# Altium PCB isokey_right.PcbDoc (part 1 of 2)
Units mm, origin at the board's own origin, x right, y up, seen from the top; angles counter-clockwise.
Board outline 380.25 x 127.5 mm, 2 copper layers (Top Layer, Bottom Layer), stack 1.569 mm thick; 152 components, 91 nets, 418 pads, 0 vias.
Unrouted connection lines stored in the file: 221.
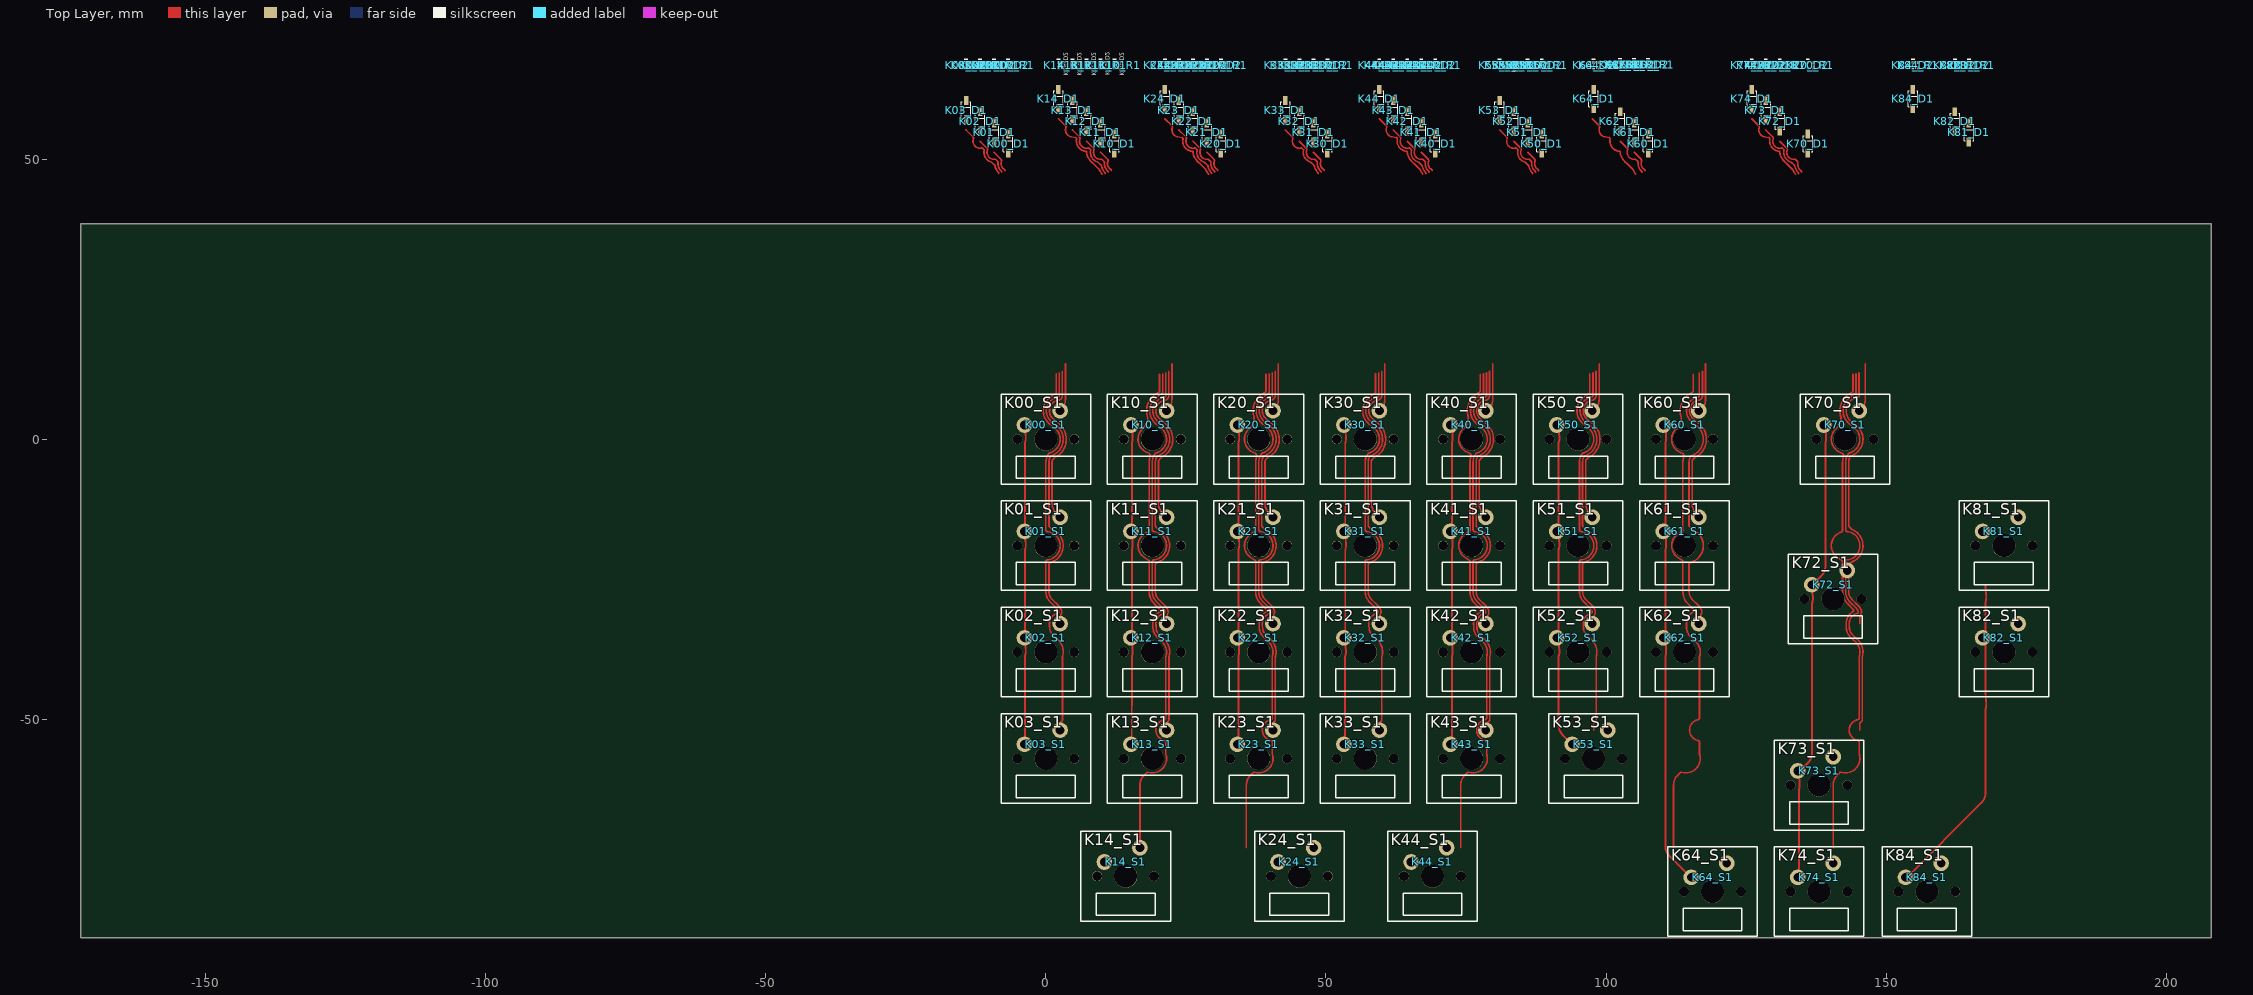
[diagram p0: Top Layer view]
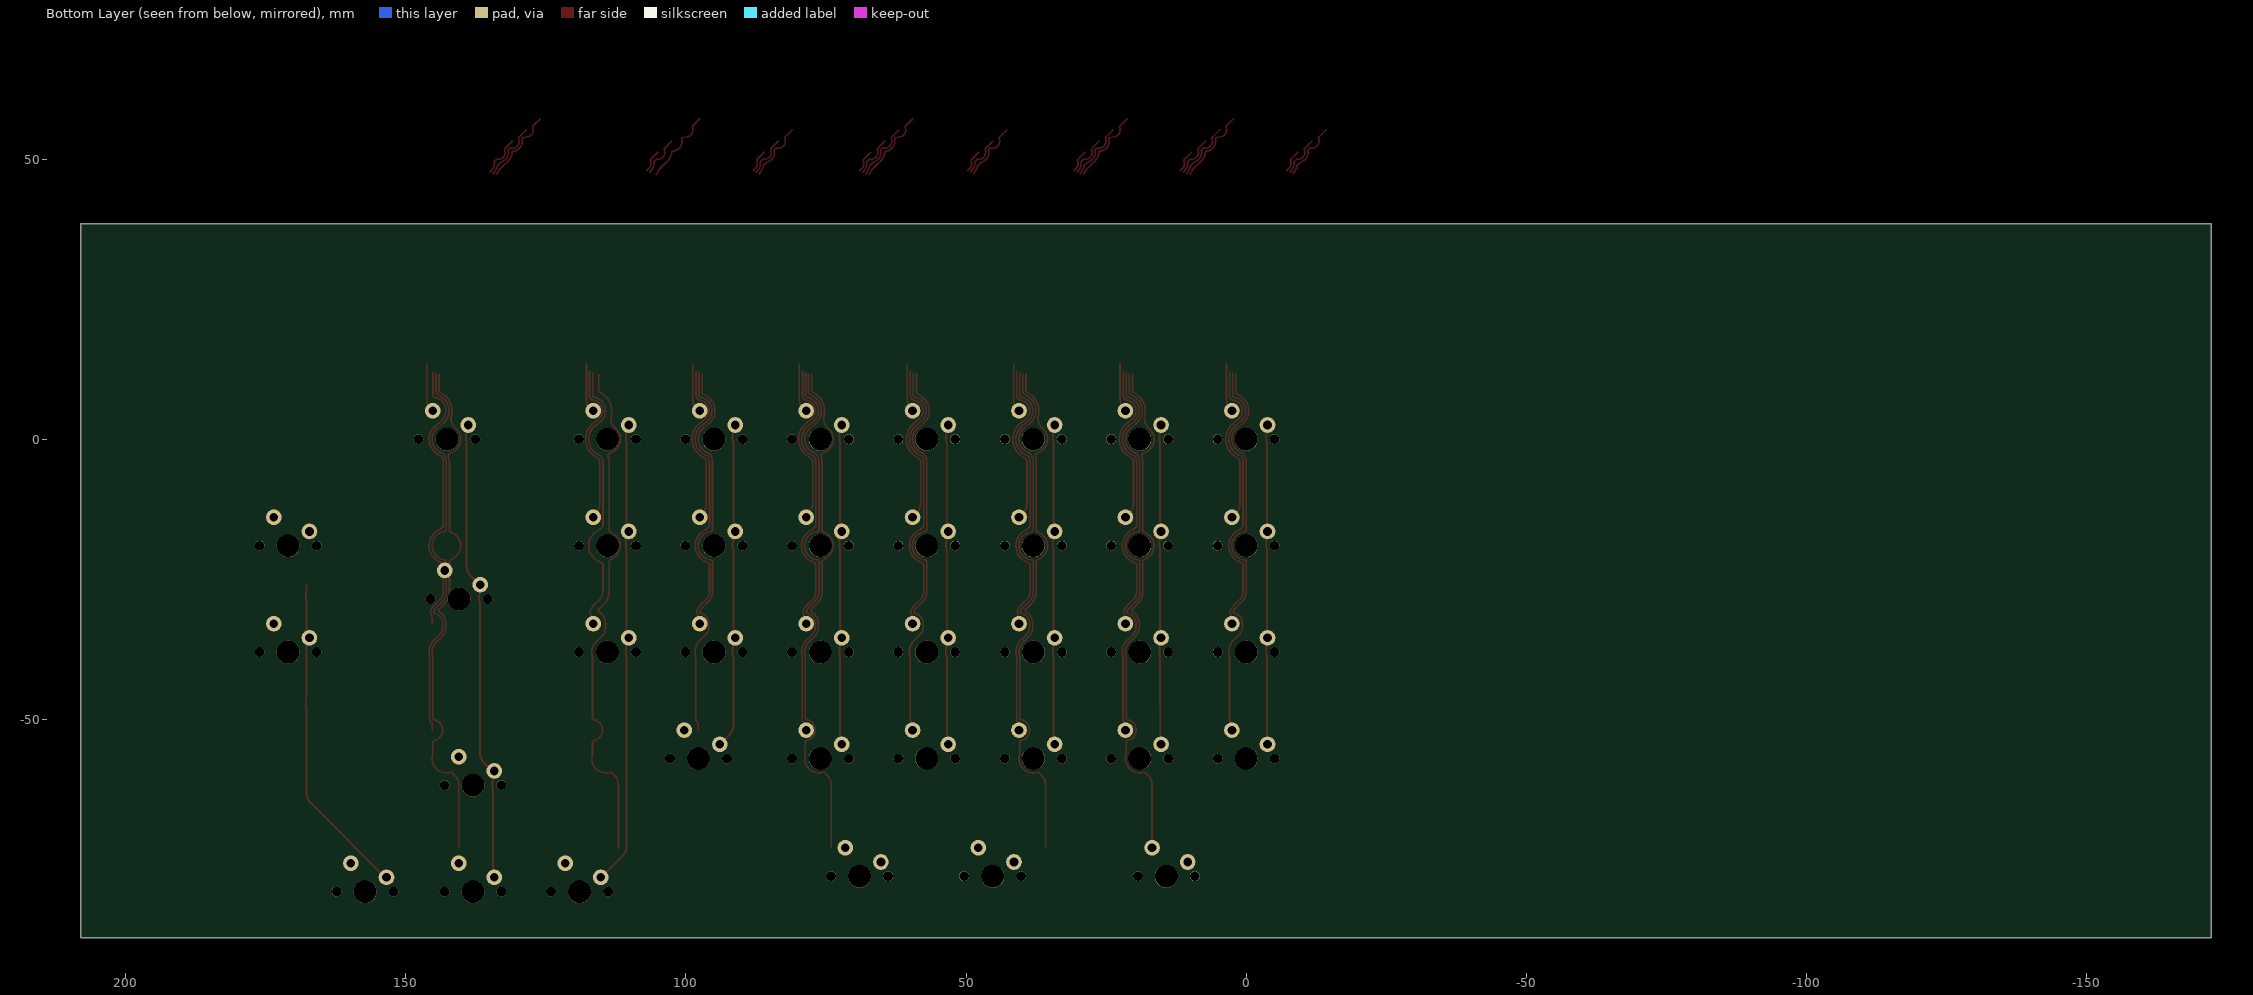
[diagram p1: Bottom Layer view, seen from below]

## Layer stack, top to bottom
Top Solder: solder mask 0.0254, SM-001, Dk 4
Top Layer: signal copper 0.035
Dielectric 1: core 1.4986, Core-043, Dk 4.3
Bottom Layer: signal copper 0.035
Bottom Solder: solder mask 0.0254, SM-001, Dk 4

## Board outline
-172.25,-89 -172.25,38.5 208,38.5 208,-89

## Design rules (kind name [scope] priority, off if disabled: settings)
Clearance [All] p1: gap=0.25 ignorepadtopadclearanceinfootprint=FALSE except(0.35: Arc-THPad Track-THPad THPad-Fill THPad-Poly THPad-Region)
ComponentClearance [All] p1: gap=0.25 collisioncheckmode=3 verticalgap=0.25 showdistances=FALSE
DiffPairsRouting [All] p1: maxlimit=0.25 minlimit=0.25 mostfreqgap=0.25 toplayer_minwidth=0.25 toplayer_maxwidth=0.25 toplayer_prefwidth=0.25 bottomlayer_minwidth=0.25 bottomlayer_maxwidth=0.25 bottomlayer_prefwidth=0.25 maxuncoupledlength=0.25
Height [All] p1: minheight=0 maxheight=25 prefheight=12.5
HoleSize [All] p1: absolutevalues=TRUE maxlimit=10 minlimit=0.2 maxpercent=80.000 minpercent=20.000
HoleToHoleClearance [All] p1: gap=0.25 allowstackedmicrovias=TRUE
MinimumSolderMaskSliver [All] p1: minsoldermaskwidth=0.15
PlaneClearance [All] p1: clearance=0.5
PlaneConnect PlaneConnect_via [isvia] p1: planeconnectstyle=Direct reliefexpansion=0.508 reliefentries=4 reliefconductorwidth=0.254 reliefairgap=0.254
PlaneConnect [All] p2: planeconnectstyle=Relief reliefexpansion=0.6 reliefentries=4 reliefconductorwidth=0.6 reliefairgap=0.3
PolygonConnect PolygonConnect_via [isvia] p1: connectstyle=Direct reliefconductorwidth=0.254 reliefentries=4 polygonreliefangle="90 Angle" airgapwidth=0.254
PolygonConnect [All] p2: connectstyle=Relief reliefconductorwidth=0.6 reliefentries=4 polygonreliefangle="90 Angle" airgapwidth=0.6
RoutingCorners [All] p1: cornerstyle=45-Degree minsetback=2.5 maxsetback=2.5
RoutingVias [All] p1: holewidth=0.3 width=0.6 viastyle="Through Hole" minholewidth=0.2 minwidth=0.3 maxholewidth=0.5 maxwidth=1
SilkToSilkClearance [All] p1: silktosilkclearance=0.15
SilkToSolderMaskClearance [IsPad] p1: minsilkscreentomaskgap=0.15 clearancetoexposedcopper=TRUE
SolderMaskExpansion SolderMaskExpansion_via [isVia] p1: expansion=-10 istentingtop=FALSE
SolderMaskExpansion [All] p2: expansion=0.05 istentingtop=FALSE
SupplyNets "Schematic Supply Nets" [InNet('GND')] p1: voltage=0.000
UnRoutedNet [All] p1: checkbadconnections=TRUE
Width [All] p1: maxlimit=5 minlimit=0.15 preferedwidth=0.25
18 further rules are at their usual default settings.

## Classes and differential pairs
component class K84: K84_D1 K84_D2 K84_R1 K84_S1
component class K82: K82_D1 K82_D2 K82_R1 K82_S1
component class K81: K81_D1 K81_D2 K81_R1 K81_S1
component class K74: K74_D1 K74_D2 K74_R1 K74_S1
component class K73: K73_D1 K73_D2 K73_R1 K73_S1
component class K72: K72_D1 K72_D2 K72_R1 K72_S1
component class K70: K70_D1 K70_D2 K70_R1 K70_S1
component class K62: K62_D1 K62_D2 K62_R1 K62_S1
component class K61: K61_D1 K61_D2 K61_R1 K61_S1
component class K22: K22_D1 K22_D2 K22_R1 K22_S1
component class K23: K23_D1 K23_D2 K23_R1 K23_S1
component class K64: K64_D1 K64_D2 K64_R1 K64_S1
component class K60: K60_D1 K60_D2 K60_R1 K60_S1
component class K53: K53_D1 K53_D2 K53_R1 K53_S1
component class K52: K52_D1 K52_D2 K52_R1 K52_S1
component class K51: K51_D1 K51_D2 K51_R1 K51_S1
component class K50: K50_D1 K50_D2 K50_R1 K50_S1
component class K44: K44_D1 K44_D2 K44_R1 K44_S1
component class K43: K43_D1 K43_D2 K43_R1 K43_S1
component class K42: K42_D1 K42_D2 K42_R1 K42_S1
component class K41: K41_D1 K41_D2 K41_R1 K41_S1
component class K40: K40_D1 K40_D2 K40_R1 K40_S1
component class K33: K33_D1 K33_D2 K33_R1 K33_S1
component class K32: K32_D1 K32_D2 K32_R1 K32_S1
component class K31: K31_D1 K31_D2 K31_R1 K31_S1
component class K30: K30_D1 K30_D2 K30_R1 K30_S1
component class K24: K24_D1 K24_D2 K24_R1 K24_S1
component class K21: K21_D1 K21_D2 K21_R1 K21_S1
component class K20: K20_D1 K20_D2 K20_R1 K20_S1
component class K14: K14_D1 K14_D2 K14_R1 K14_S1
component class K13: K13_D1 K13_D2 K13_R1 K13_S1
component class K12: K12_D1 K12_D2 K12_R1 K12_S1
component class K11: K11_D1 K11_D2 K11_R1 K11_S1
component class K10: K10_D1 K10_D2 K10_R1 K10_S1
component class K03: K03_D1 K03_D2 K03_R1 K03_S1
component class K02: K02_D1 K02_D2 K02_R1 K02_S1
component class K01: K01_D1 K01_D2 K01_R1 K01_S1
channel class key-cell: K00 K01 K02 K03 K10 K11 K12 K13 K14 K20 K21 K22 K23 K24 K30 K31 K32 K33 K40 K41 K42 K43 K44 K50 K51 K52 K53 K60 K61 K62 K64 K70 K72 K73 K74 K81 K82 K84
component class summary: PCB?
component class K00: K00_D1 K00_D2 K00_R1 K00_S1

## Components (designator, comment, footprint, x,y, rotation, side; value= is the part's Value field where it differs from the comment)
K00_D1 "B5819W" SOD-123_K1-A2 -6.75,52.75 r90 top (schematic designator D1)
K00_D2 "K" 0402_[1005]_K1-A2_LED -6.75,66.75 r90 top (schematic designator D2)
K00_R1 "1k8" 0402_[1005] -5.75,66.75 r90 top (schematic designator R1)
K00_S1 "MecSwitch" TACTILE_SWITCH_GATERON_PCB 0,0 r0 top (schematic designator S1)
K01_D1 "B5819W" SOD-123_K1-A2 -9.25,54.75 r90 top (schematic designator D1)
K01_D2 "K" 0402_[1005]_K1-A2_LED -9.25,66.75 r90 top (schematic designator D2)
K01_R1 "1k8" 0402_[1005] -8.25,66.75 r90 top (schematic designator R1)
K01_S1 "MecSwitch" TACTILE_SWITCH_GATERON_PCB 0,-19 r0 top (schematic designator S1)
K02_D1 "B5819W" SOD-123_K1-A2 -11.75,56.75 r90 top (schematic designator D1)
K02_D2 "K" 0402_[1005]_K1-A2_LED -11.75,66.75 r90 top (schematic designator D2)
K02_R1 "1k8" 0402_[1005] -10.75,66.75 r90 top (schematic designator R1)
K02_S1 "MecSwitch" TACTILE_SWITCH_GATERON_PCB 0,-38 r0 top (schematic designator S1)
K03_D1 "B5819W" SOD-123_K1-A2 -14.25,58.75 r90 top (schematic designator D1)
K03_D2 "K" 0402_[1005]_K1-A2_LED -14.25,66.75 r90 top (schematic designator D2)
K03_R1 "1k8" 0402_[1005] -13.25,66.75 r90 top (schematic designator R1)
K03_S1 "MecSwitch" TACTILE_SWITCH_GATERON_PCB 0,-57 r0 top (schematic designator S1)
K10_D1 "B5819W" SOD-123_K1-A2 12.25,52.75 r90 top (schematic designator D1)
K10_D2 "K" 0402_[1005]_K1-A2_LED 12.25,66.75 r90 top (schematic designator D2)
K10_R1 "1k8" 0402_[1005] 13.25,66.75 r90 top (schematic designator R1)
K10_S1 "MecSwitch" TACTILE_SWITCH_GATERON_PCB 19,0 r0 top (schematic designator S1)
K11_D1 "B5819W" SOD-123_K1-A2 9.75,54.75 r90 top (schematic designator D1)
K11_D2 "K" 0402_[1005]_K1-A2_LED 9.75,66.75 r90 top (schematic designator D2)
K11_R1 "1k8" 0402_[1005] 10.75,66.75 r90 top (schematic designator R1)
K11_S1 "MecSwitch" TACTILE_SWITCH_GATERON_PCB 19,-19 r0 top (schematic designator S1)
K12_D1 "B5819W" SOD-123_K1-A2 7.25,56.75 r90 top (schematic designator D1)
K12_D2 "K" 0402_[1005]_K1-A2_LED 7.25,66.75 r90 top (schematic designator D2)
K12_R1 "1k8" 0402_[1005] 8.25,66.75 r90 top (schematic designator R1)
K12_S1 "MecSwitch" TACTILE_SWITCH_GATERON_PCB 19,-38 r0 top (schematic designator S1)
K13_D1 "B5819W" SOD-123_K1-A2 4.75,58.75 r90 top (schematic designator D1)
K13_D2 "K" 0402_[1005]_K1-A2_LED 4.75,66.75 r90 top (schematic designator D2)
K13_R1 "1k8" 0402_[1005] 5.75,66.75 r90 top (schematic designator R1)
K13_S1 "MecSwitch" TACTILE_SWITCH_GATERON_PCB 19,-57 r0 top (schematic designator S1)
K14_D1 "B5819W" SOD-123_K1-A2 2.25,60.75 r90 top (schematic designator D1)
K14_D2 "K" 0402_[1005]_K1-A2_LED 2.25,66.75 r90 top (schematic designator D2)
K14_R1 "1k8" 0402_[1005] 3.25,66.75 r90 top (schematic designator R1)
K14_S1 "MecSwitch" TACTILE_SWITCH_GATERON_PCB 14.25,-78 r0 top (schematic designator S1)
K20_D1 "B5819W" SOD-123_K1-A2 31.25,52.75 r90 top (schematic designator D1)
K20_D2 "K" 0402_[1005]_K1-A2_LED 31.25,66.75 r90 top (schematic designator D2)
K20_R1 "1k8" 0402_[1005] 32.25,66.75 r90 top (schematic designator R1)
K20_S1 "MecSwitch" TACTILE_SWITCH_GATERON_PCB 38,0 r0 top (schematic designator S1)
K21_D1 "B5819W" SOD-123_K1-A2 28.75,54.75 r90 top (schematic designator D1)
K21_D2 "K" 0402_[1005]_K1-A2_LED 28.75,66.75 r90 top (schematic designator D2)
K21_R1 "1k8" 0402_[1005] 29.75,66.75 r90 top (schematic designator R1)
K21_S1 "MecSwitch" TACTILE_SWITCH_GATERON_PCB 38,-19 r0 top (schematic designator S1)
K22_D1 "B5819W" SOD-123_K1-A2 26.25,56.75 r90 top (schematic designator D1)
K22_D2 "K" 0402_[1005]_K1-A2_LED 26.25,66.75 r90 top (schematic designator D2)
K22_R1 "1k8" 0402_[1005] 27.25,66.75 r90 top (schematic designator R1)
K22_S1 "MecSwitch" TACTILE_SWITCH_GATERON_PCB 38,-38 r0 top (schematic designator S1)
K23_D1 "B5819W" SOD-123_K1-A2 23.75,58.75 r90 top (schematic designator D1)
K23_D2 "K" 0402_[1005]_K1-A2_LED 23.75,66.75 r90 top (schematic designator D2)
K23_R1 "1k8" 0402_[1005] 24.75,66.75 r90 top (schematic designator R1)
K23_S1 "MecSwitch" TACTILE_SWITCH_GATERON_PCB 38,-57 r0 top (schematic designator S1)
K24_D1 "B5819W" SOD-123_K1-A2 21.25,60.75 r90 top (schematic designator D1)
K24_D2 "K" 0402_[1005]_K1-A2_LED 21.25,66.75 r90 top (schematic designator D2)
K24_R1 "1k8" 0402_[1005] 22.25,66.75 r90 top (schematic designator R1)
K24_S1 "MecSwitch" TACTILE_SWITCH_GATERON_PCB 45.25,-78 r0 top (schematic designator S1)
K30_D1 "B5819W" SOD-123_K1-A2 50.25,52.75 r90 top (schematic designator D1)
K30_D2 "K" 0402_[1005]_K1-A2_LED 50.25,66.75 r90 top (schematic designator D2)
K30_R1 "1k8" 0402_[1005] 51.25,66.75 r90 top (schematic designator R1)
K30_S1 "MecSwitch" TACTILE_SWITCH_GATERON_PCB 57,0 r0 top (schematic designator S1)
K31_D1 "B5819W" SOD-123_K1-A2 47.75,54.75 r90 top (schematic designator D1)
K31_D2 "K" 0402_[1005]_K1-A2_LED 47.75,66.75 r90 top (schematic designator D2)
K31_R1 "1k8" 0402_[1005] 48.75,66.75 r90 top (schematic designator R1)
K31_S1 "MecSwitch" TACTILE_SWITCH_GATERON_PCB 57,-19 r0 top (schematic designator S1)
K32_D1 "B5819W" SOD-123_K1-A2 45.25,56.75 r90 top (schematic designator D1)
K32_D2 "K" 0402_[1005]_K1-A2_LED 45.25,66.75 r90 top (schematic designator D2)
K32_R1 "1k8" 0402_[1005] 46.25,66.75 r90 top (schematic designator R1)
K32_S1 "MecSwitch" TACTILE_SWITCH_GATERON_PCB 57,-38 r0 top (schematic designator S1)
K33_D1 "B5819W" SOD-123_K1-A2 42.75,58.75 r90 top (schematic designator D1)
K33_D2 "K" 0402_[1005]_K1-A2_LED 42.75,66.75 r90 top (schematic designator D2)
K33_R1 "1k8" 0402_[1005] 43.75,66.75 r90 top (schematic designator R1)
K33_S1 "MecSwitch" TACTILE_SWITCH_GATERON_PCB 57,-57 r0 top (schematic designator S1)
K40_D1 "B5819W" SOD-123_K1-A2 69.5,52.75 r90 top (schematic designator D1)
K40_D2 "K" 0402_[1005]_K1-A2_LED 69.5,66.75 r90 top (schematic designator D2)
K40_R1 "1k8" 0402_[1005] 70.5,66.75 r90 top (schematic designator R1)
K40_S1 "MecSwitch" TACTILE_SWITCH_GATERON_PCB 76,0 r0 top (schematic designator S1)
K41_D1 "B5819W" SOD-123_K1-A2 67,54.75 r90 top (schematic designator D1)
K41_D2 "K" 0402_[1005]_K1-A2_LED 67,66.75 r90 top (schematic designator D2)
K41_R1 "1k8" 0402_[1005] 68,66.75 r90 top (schematic designator R1)
K41_S1 "MecSwitch" TACTILE_SWITCH_GATERON_PCB 76,-19 r0 top (schematic designator S1)
K42_D1 "B5819W" SOD-123_K1-A2 64.5,56.75 r90 top (schematic designator D1)
K42_D2 "K" 0402_[1005]_K1-A2_LED 64.5,66.75 r90 top (schematic designator D2)
K42_R1 "1k8" 0402_[1005] 65.5,66.75 r90 top (schematic designator R1)
K42_S1 "MecSwitch" TACTILE_SWITCH_GATERON_PCB 76,-38 r0 top (schematic designator S1)
K43_D1 "B5819W" SOD-123_K1-A2 62,58.75 r90 top (schematic designator D1)
K43_D2 "K" 0402_[1005]_K1-A2_LED 62,66.75 r90 top (schematic designator D2)
K43_R1 "1k8" 0402_[1005] 63,66.75 r90 top (schematic designator R1)
K43_S1 "MecSwitch" TACTILE_SWITCH_GATERON_PCB 76,-57 r0 top (schematic designator S1)
K44_D1 "B5819W" SOD-123_K1-A2 59.5,60.75 r90 top (schematic designator D1)
K44_D2 "K" 0402_[1005]_K1-A2_LED 59.5,66.75 r90 top (schematic designator D2)
K44_R1 "1k8" 0402_[1005] 60.5,66.75 r90 top (schematic designator R1)
K44_S1 "MecSwitch" TACTILE_SWITCH_GATERON_PCB 69,-78 r0 top (schematic designator S1)
K50_D1 "B5819W" SOD-123_K1-A2 88.5,52.75 r90 top (schematic designator D1)
K50_D2 "K" 0402_[1005]_K1-A2_LED 88.5,66.75 r90 top (schematic designator D2)
K50_R1 "1k8" 0402_[1005] 89.5,66.75 r90 top (schematic designator R1)
K50_S1 "MecSwitch" TACTILE_SWITCH_GATERON_PCB 95,0 r0 top (schematic designator S1)
K51_D1 "B5819W" SOD-123_K1-A2 86,54.75 r90 top (schematic designator D1)
K51_D2 "K" 0402_[1005]_K1-A2_LED 86,66.75 r90 top (schematic designator D2)
K51_R1 "1k8" 0402_[1005] 87,66.75 r90 top (schematic designator R1)
K51_S1 "MecSwitch" TACTILE_SWITCH_GATERON_PCB 95,-19 r0 top (schematic designator S1)
K52_D1 "B5819W" SOD-123_K1-A2 83.5,56.75 r90 top (schematic designator D1)
K52_D2 "K" 0402_[1005]_K1-A2_LED 83.5,66.75 r270 top (schematic designator D2)
K52_R1 "1k8" 0402_[1005] 84.5,66.75 r90 top (schematic designator R1)
K52_S1 "MecSwitch" TACTILE_SWITCH_GATERON_PCB 95,-38 r0 top (schematic designator S1)
K53_D1 "B5819W" SOD-123_K1-A2 81,58.75 r90 top (schematic designator D1)
K53_D2 "K" 0402_[1005]_K1-A2_LED 81,66.75 r90 top (schematic designator D2)
K53_R1 "1k8" 0402_[1005] 82,66.75 r90 top (schematic designator R1)
K53_S1 "MecSwitch" TACTILE_SWITCH_GATERON_PCB 97.75,-57 r0 top (schematic designator S1)
K60_D1 "B5819W" SOD-123_K1-A2 107.5,52.75 r90 top (schematic designator D1)
K60_D2 "K" 0402_[1005]_K1-A2_LED 107.5,66.8 r90 top (schematic designator D2)
K60_R1 "1k8" 0402_[1005] 108.5,66.8 r90 top (schematic designator R1)
K60_S1 "MecSwitch" TACTILE_SWITCH_GATERON_PCB 114,0 r0 top (schematic designator S1)
K61_D1 "B5819W" SOD-123_K1-A2 105,54.75 r90 top (schematic designator D1)
K61_D2 "K" 0402_[1005]_K1-A2_LED 105,66.8 r90 top (schematic designator D2)
K61_R1 "1k8" 0402_[1005] 106,66.8 r90 top (schematic designator R1)
K61_S1 "MecSwitch" TACTILE_SWITCH_GATERON_PCB 114,-19 r0 top (schematic designator S1)
K62_D1 "B5819W" SOD-123_K1-A2 102.5,56.75 r90 top (schematic designator D1)
K62_D2 "K" 0402_[1005]_K1-A2_LED 102.5,66.8 r90 top (schematic designator D2)
K62_R1 "1k8" 0402_[1005] 103.5,66.8 r90 top (schematic designator R1)
K62_S1 "MecSwitch" TACTILE_SWITCH_GATERON_PCB 114,-38 r0 top (schematic designator S1)
K64_D1 "B5819W" SOD-123_K1-A2 97.75,60.75 r90 top (schematic designator D1)
K64_D2 "K" 0402_[1005]_K1-A2_LED 97.75,66.75 r90 top (schematic designator D2)
K64_R1 "1k8" 0402_[1005] 98.75,66.75 r90 top (schematic designator R1)
K64_S1 "MecSwitch" TACTILE_SWITCH_GATERON_PCB 119,-80.75 r0 top (schematic designator S1)
K70_D1 "B5819W" SOD-123_K1-A2 136,52.75 r90 top (schematic designator D1)
K70_D2 "K" 0402_[1005]_K1-A2_LED 136,66.75 r90 top (schematic designator D2)
K70_R1 "1k8" 0402_[1005] 137,66.75 r90 top (schematic designator R1)
K70_S1 "MecSwitch" TACTILE_SWITCH_GATERON_PCB 142.65,0 r0 top (schematic designator S1)
K72_D1 "B5819W" SOD-123_K1-A2 131,56.75 r90 top (schematic designator D1)
K72_D2 "K" 0402_[1005]_K1-A2_LED 131,66.75 r90 top (schematic designator D2)
K72_R1 "1k8" 0402_[1005] 132,66.75 r90 top (schematic designator R1)
K72_S1 "MecSwitch" TACTILE_SWITCH_GATERON_PCB 140.5,-28.5 r0 top (schematic designator S1)
K73_D1 "B5819W" SOD-123_K1-A2 128.5,58.75 r90 top (schematic designator D1)
K73_D2 "K" 0402_[1005]_K1-A2_LED 128.5,66.75 r90 top (schematic designator D2)
K73_R1 "1k8" 0402_[1005] 129.5,66.75 r90 top (schematic designator R1)
K73_S1 "MecSwitch" TACTILE_SWITCH_GATERON_PCB 138,-61.75 r0 top (schematic designator S1)
K74_D1 "B5819W" SOD-123_K1-A2 126,60.75 r90 top (schematic designator D1)
K74_D2 "K" 0402_[1005]_K1-A2_LED 126,66.75 r90 top (schematic designator D2)
K74_R1 "1k8" 0402_[1005] 127,66.75 r90 top (schematic designator R1)
K74_S1 "MecSwitch" TACTILE_SWITCH_GATERON_PCB 138,-80.75 r0 top (schematic designator S1)
K81_D1 "B5819W" SOD-123_K1-A2 164.75,54.75 r90 top (schematic designator D1)
K81_D2 "K" 0402_[1005]_K1-A2_LED 164.75,66.75 r90 top (schematic designator D2)
K81_R1 "1k8" 0402_[1005] 165.75,66.75 r90 top (schematic designator R1)
K81_S1 "MecSwitch" TACTILE_SWITCH_GATERON_PCB 171,-19 r0 top (schematic designator S1)
K82_D1 "B5819W" SOD-123_K1-A2 162.25,56.75 r90 top (schematic designator D1)
K82_D2 "K" 0402_[1005]_K1-A2_LED 162.25,66.75 r90 top (schematic designator D2)
K82_R1 "1k8" 0402_[1005] 163.25,66.75 r90 top (schematic designator R1)
K82_S1 "MecSwitch" TACTILE_SWITCH_GATERON_PCB 171,-38 r0 top (schematic designator S1)
K84_D1 "B5819W" SOD-123_K1-A2 154.75,60.75 r90 top (schematic designator D1)
K84_D2 "K" 0402_[1005]_K1-A2_LED 154.75,66.75 r90 top (schematic designator D2)
K84_R1 "1k8" 0402_[1005] 155.75,66.75 r90 top (schematic designator R1)
K84_S1 "MecSwitch" TACTILE_SWITCH_GATERON_PCB 157.25,-80.75 r0 top (schematic designator S1)

## Footprints (in the part's own frame and the unit in brackets; to place one, negate y for a bottom-side part, rotate by r counter-clockwise, add the part's x,y. Pads: shape width x height; smd on the part's side, far side on the other; paste and mask are expansions set on the pad)
0402_[1005] [mm] "Chip Capacitor, Body 1.0x0.5mm, IPC High Density"
  rect 0.6x0.5 smd: 1(-0.5,0) 2(0.5,0)
  body extent -0.5,-0.25 0.5,0.25, height 0.42
0402_[1005]_K1-A2_LED [mm] "Chip Capacitor, Body 1.0x0.5mm, IPC High Density"
  rect 0.6x0.5 smd: 1(0.5,0) 2(-0.5,0)
  silkscreen extent 1.1,-0.3 1.1,0.3, body extent -0.5,-0.25 0.5,0.25, height 0.42
SOD-123_K1-A2 [mm] "SOD-123; 2 Leads; Body 2.7 x 1.6 mm, (LxW)"
  rect 1.6x0.8 smd: 1(1.7,0) 2(-1.7,0)
  silkscreen extent -1.45,-0.85 1.45,0.85, body extent -1.85,-0.8 1.85,0.8, height 1.27
TACTILE_SWITCH_GATERON_PCB [mm] "16x16mm pcb mount version"
  round 2.8 hole 1.55: 1(-3.81,2.54) 2(2.54,5.08)
  round 1.75 hole 1.75 unplated: Hole(-5.08,0) Hole(5.08,0)
  round 4.1 hole 4.1 unplated: Hole(0,0)
  silkscreen extent -8,-8 8,8, body extent -7.82,-8.16 7.82,8.16, height 14.9

## Part data
K00_D1 K01_D1 K02_D1 K03_D1 K10_D1 K11_D1 K12_D1 K13_D1 K14_D1 K20_D1 K21_D1 K22_D1 K23_D1 K24_D1 K30_D1 K31_D1 K32_D1 K33_D1 K40_D1 K41_D1 K42_D1 K43_D1 K44_D1 K50_D1 K51_D1 K52_D1 K53_D1 K60_D1 K61_D1 K62_D1 K64_D1 K70_D1 K72_D1 K73_D1 K74_D1 K81_D1 K82_D1 K84_D1: library part diode_small, "Diode Schottky  low Vf, If 1A ( LCSC C8598)", CODE LCSC=C8598, MountTechnology=SMT
K00_D2 K01_D2 K02_D2 K03_D2 K10_D2 K11_D2 K12_D2 K13_D2 K14_D2 K20_D2 K21_D2 K22_D2 K23_D2 K24_D2 K30_D2 K31_D2 K32_D2 K33_D2 K40_D2 K41_D2 K42_D2 K43_D2 K44_D2 K50_D2 K51_D2 K52_D2 K53_D2 K60_D2 K61_D2 K62_D2 K64_D2 K70_D2 K72_D2 K73_D2 K74_D2 K81_D2 K82_D2 K84_D2: library part DiodeLedSmall, "Diode Led", MountTechnology=SMT, Publisher="Develer srl", Revision=0.1
K00_R1 K01_R1 K02_R1 K03_R1 K10_R1 K11_R1 K12_R1 K13_R1 K14_R1 K20_R1 K21_R1 K22_R1 K23_R1 K24_R1 K30_R1 K31_R1 K32_R1 K33_R1 K40_R1 K41_R1 K42_R1 K43_R1 K44_R1 K50_R1 K51_R1 K52_R1 K53_R1 K60_R1 K61_R1 K62_R1 K64_R1 K70_R1 K72_R1 K73_R1 K74_R1 K81_R1 K82_R1 K84_R1: library part Res, "Resistor", MountTechnology=SMT, Publisher="Develer srl", Revision=0.1
K00_S1 K01_S1 K02_S1 K03_S1 K10_S1 K11_S1 K12_S1 K13_S1 K14_S1 K20_S1 K21_S1 K22_S1 K23_S1 K24_S1 K30_S1 K31_S1 K32_S1 K33_S1 K40_S1 K41_S1 K42_S1 K43_S1 K44_S1 K50_S1 K51_S1 K52_S1 K53_S1 K60_S1 K61_S1 K62_S1 K64_S1 K70_S1 K72_S1 K73_S1 K74_S1 K81_S1 K82_S1 K84_S1: library part SWITCH-RA, "Tactile Switch Right Angle 6x6", Part Number="Tyco FSMRA2JH", MountTechnology=THD, Purchase Code="RS 479-1520"

## Nets (pads, with @x,y where several pads share a name; then routed paths per layer and width w, separated by ;. In a path a pad name is that pad's centre, name@x,y a point inside that pad or via, vN(x,y) a via of type N, cw(c..) or ccw(c..) an arc to the next point about the centre after c; other vN are vias at no path point)
C0: K00_S1.1 K01_S1.1 K02_S1.1 K03_S1.1 | length 56.8
  Top Layer w0.35: K03_S1.1@-3.719,-54.61 -3.719,-47.502 -3.717,-47.5 -3.717,-38.761 cw(c-3.367,-38.762) -3.692,-38.631 ccw(c-4.987,-38.1) -3.589,-38.025 K02_S1.1@-3.717,-35.561 ; K02_S1.1@-3.714,-35.309 -3.714,-19.709 cw(c-3.364,-19.71) -3.688,-19.579 ccw(c-4.984,-19.048) -3.586,-18.973 K01_S1.1@-3.714,-16.509 ; K01_S1.1@-3.714,-16.309 -3.714,-0.661 cw(c-3.364,-0.662) -3.688,-0.531 ccw(c-4.984,0) -3.586,0.075 K00_S1.1@-3.714,2.539
C1: K10_S1.1 K11_S1.1 K12_S1.1 K13_S1.1 K14_S1.1 | length 56.8
  Top Layer w0.35: K13_S1.1@15.335,-54.605 15.335,-47.496 15.336,-47.495 15.336,-38.755 cw(c15.686,-38.756) 15.362,-38.625 ccw(c14.066,-38.095) 15.464,-38.02 K12_S1.1@15.336,-35.556 ; K12_S1.1@15.34,-35.303 15.34,-19.703 cw(c15.69,-19.705) 15.366,-19.573 ccw(c14.07,-19.043) 15.468,-18.968 K11_S1.1@15.34,-16.504 ; K11_S1.1@15.34,-16.303 15.34,-0.655 cw(c15.69,-0.656) 15.366,-0.525 ccw(c14.07,0.005) 15.468,0.08 K10_S1.1@15.34,2.544
C2: K20_S1.1 K21_S1.1 K22_S1.1 K23_S1.1 K24_S1.1 | length 56.8
  Top Layer w0.35: K23_S1.1@34.383,-54.605 34.383,-47.496 34.385,-47.495 34.385,-38.755 cw(c34.735,-38.756) 34.41,-38.625 ccw(c33.115,-38.095) 34.513,-38.02 K22_S1.1@34.385,-35.556 ; K22_S1.1@34.388,-35.303 34.388,-19.703 cw(c34.738,-19.705) 34.414,-19.573 ccw(c33.118,-19.043) 34.516,-18.968 K21_S1.1@34.388,-16.504 ; K21_S1.1@34.388,-16.303 34.388,-0.655 cw(c34.738,-0.656) 34.414,-0.525 ccw(c33.118,0.005) 34.516,0.08 K20_S1.1@34.388,2.544
C3: K30_S1.1 K31_S1.1 K32_S1.1 K33_S1.1 | length 56.8
  Top Layer w0.35: K33_S1.1@53.431,-54.605 53.431,-47.496 53.433,-47.495 53.433,-38.755 cw(c53.783,-38.756) 53.458,-38.625 ccw(c52.163,-38.095) 53.561,-38.02 K32_S1.1@53.433,-35.556 ; K32_S1.1@53.436,-35.303 53.436,-19.703 cw(c53.786,-19.705) 53.462,-19.573 ccw(c52.166,-19.043) 53.564,-18.968 K31_S1.1@53.436,-16.504 ; K31_S1.1@53.436,-16.303 53.436,-0.655 cw(c53.786,-0.656) 53.462,-0.525 ccw(c52.166,0.005) 53.564,0.08 K30_S1.1@53.436,2.544
C4: K40_S1.1 K41_S1.1 K42_S1.1 K43_S1.1 K44_S1.1 | length 56.8
  Top Layer w0.35: K43_S1.1@72.479,-54.605 72.479,-47.496 72.481,-47.495 72.481,-38.755 cw(c72.831,-38.756) 72.507,-38.625 ccw(c71.211,-38.095) 72.609,-38.02 K42_S1.1@72.481,-35.556 ; K42_S1.1@72.485,-35.303 72.485,-19.703 cw(c72.835,-19.705) 72.51,-19.573 ccw(c71.215,-19.043) 72.613,-18.968 K41_S1.1@72.485,-16.504 ; K41_S1.1@72.485,-16.303 72.485,-0.655 cw(c72.835,-0.656) 72.51,-0.525 ccw(c71.215,0.005) 72.613,0.08 K40_S1.1@72.485,2.544
C5: K50_S1.1 K51_S1.1 K52_S1.1 K53_S1.1 | length 58.1
  Top Layer w0.35: K51_S1.1@91.527,-16.509 91.655,-18.973 cw(c90.257,-19.048) 91.553,-19.579 ccw(c91.877,-19.71) 91.527,-19.709 91.527,-35.556 91.655,-38.021 cw(c90.257,-38.096) 91.553,-38.627 ccw(c91.877,-38.758) 91.527,-38.757 91.527,-51.012 ccw(c94.067,-51.012) 92.271,-52.808 K53_S1.1@94.067,-54.604 ; K51_S1.1@91.527,-16.508 91.527,-0.661 cw(c91.877,-0.662) 91.553,-0.531 ccw(c90.257,0) 91.655,0.075 K50_S1.1@91.527,2.539
C6: K60_S1.1 K61_S1.1 K62_S1.1 K64_S1.1 | length 82.9
  Top Layer w0.35: K61_S1.1@110.576,-16.509 110.704,-18.973 cw(c109.306,-19.048) 110.601,-19.579 ccw(c110.926,-19.71) 110.576,-19.709 110.576,-35.558 K62_S1.1@110.578,-35.56 ; K61_S1.1@110.576,-16.508 110.576,-0.661 cw(c110.926,-0.662) 110.601,-0.531 ccw(c109.306,0) 110.704,0.075 K60_S1.1@110.576,2.539 ; K62_S1.1@110.578,-35.561 110.706,-38.025 cw(c109.308,-38.1) 110.603,-38.631 ccw(c110.928,-38.762) 110.578,-38.761 110.578,-72.602 ccw(c113.118,-72.602) 111.322,-74.398 K64_S1.1@115.346,-78.423
C7: K70_S1.1 K72_S1.1 K73_S1.1 K74_S1.1 | length 82.8
  Top Layer w0.35: K73_S1.1@134.391,-59.374 134.519,-61.838 cw(c133.121,-61.913) 134.416,-62.443 ccw(c134.741,-62.574) 134.391,-62.573 134.391,-78.419 K74_S1.1@134.394,-78.423 ; K73_S1.1@134.391,-59.373 136.036,-57.727 ccw(c134.24,-55.931) 136.78,-55.931 136.78,-29.236 cw(c137.13,-29.237) 136.805,-29.106 ccw(c135.51,-28.575) 136.908,-28.5 K72_S1.1@136.78,-26.036 ; K72_S1.1@136.78,-26.035 138.402,-24.413 ccw(c136.606,-22.617) 139.146,-22.617 139.146,-0.661 cw(c139.496,-0.662) 139.172,-0.531 ccw(c137.876,0) 139.274,0.075 K70_S1.1@139.146,2.539
C8: K81_S1.1 K82_S1.1 K84_S1.1 | length 58.2
  Top Layer w0.35: K84_S1.1@153.442,-78.423 166.974,-64.891 ccw(c165.178,-63.095) 167.718,-63.095 167.718,-48.281 cw(c168.068,-48.282) 167.744,-48.151 ccw(c166.448,-47.62) 167.846,-47.545 167.718,-45.081 167.718,-29.233 cw(c168.068,-29.234) 167.744,-29.103 ccw(c166.448,-28.572) 167.846,-28.497 167.718,-26.033
GND: K00_R1.1 K01_R1.1 K02_R1.1 K03_R1.1 K10_R1.1 K11_R1.1 K12_R1.1 K13_R1.1 K14_R1.1 K20_R1.1 K21_R1.1 K22_R1.1 K23_R1.1 K24_R1.1 K30_R1.1 K31_R1.1 K32_R1.1 K33_R1.1 K40_R1.1 K41_R1.1 K42_R1.1 K43_R1.1 K44_R1.1 K50_R1.1 K51_R1.1 K52_R1.1 K53_R1.1 K60_R1.1 K61_R1.1 K62_R1.1 K64_R1.1 K70_R1.1 K72_R1.1 K73_R1.1 K74_R1.1 K81_R1.1 K82_R1.1 K84_R1.1
NetK00_D1_2: K00_D1.2 K00_D2.2 K00_S1.2 | length 8.7
  Top Layer w0.3: K00_S1.2@2.54,5.08 2.756,5.296 ccw(c0.96,7.092) 3.5,7.092 3.5,13.45
NetK00_D2_1: K00_D2.1 K00_R1.2
NetK01_D1_2: K01_D1.2 K01_D2.2 K01_S1.2 | length 34.7
  Top Layer w0.3: -9.25,51.2 -7.994,49.944 -7.993,49.943 cw(c-8.207,49.733) -7.921,49.644 -7.944,49.571 ccw(c-6.75,49.2) -7.435,48.154 cw(c-7.6,47.904) -7.3,47.904 ; 1.008,3.956 ccw(c2.54,5.08) 1.416,3.548 ; 1.981,3.085 1.663,3.345 1.416,3.548 ; 1.981,3.085 2.249,2.875 cw(c0,0) 1.558,-3.301 1.294,-3.565 ccw(c3.09,-5.361) 1.205,-3.658 ccw(c1.428,-3.859) 1.136,-3.791 ccw(c2.54,-4.11) 1.1,-4.11 1.1,-11.428 ccw(c3.64,-11.428) 1.844,-13.224 K01_S1.2@2.54,-13.92 ; 2.1,6.928 cw(c2.54,5.08) 2.323,6.968 ; 2.95,12.154 2.95,7.795 cw(c2.1,7.795) 2.793,7.302 cw(c2.1,7.795) 2.767,7.268 cw(c2.1,7.795) 2.627,7.128 2.591,7.099 cw(c2.1,7.719) 2.4,6.987 cw(c2.287,7.265) 2.323,6.968 ; 1.416,3.548 cw(c2.54,5.08) 2.323,6.968
NetK01_D2_1: K01_D2.1 K01_R1.2
NetK02_D1_2: K02_D1.2 K02_D2.2 K02_S1.2 | length 58.7
  Top Layer w0.3: -11.75,53.2 -10.493,51.943 cw(c-10.706,51.732) -10.424,51.629 ccw(c-9.25,51.2) -8.995,49.976 -8.628,49.609 cw(c-8.841,49.398) -8.542,49.37 ccw(c-6.75,49.2) -8.436,48.57 ccw(c-6.75,49.2) -7.95,47.858 cw(c-8.15,47.635) -7.85,47.635 ; 0.825,3.33 ccw(c2.54,5.08) 0.865,3.292 ; 2.4,11.885 2.4,7.795 cw(c2.1,7.795) 2.149,7.499 ccw(c2.54,5.08) 0.865,3.292 ; K02_S1.2@2.54,-32.92 K02_S1.2@2.54,-31.842 ; K02_S1.2@2.54,-31.841 cw(c2.84,-31.842) 2.556,-31.747 2.785,-31.063 ccw(c1.979,-30.793) 2.73,-30.395 ccw(c0,-31.842) 2.184,-29.656 1.134,-28.606 cw(c2.54,-27.198) 0.55,-27.198 0.55,-22.217 1.453,-21.739 ccw(c0,-19) 2.729,-17.529 ccw(c0,-19) 1.183,-16.135 cw(c1.299,-15.858) 1.089,-16.072 0.637,-15.62 cw(c0.85,-15.409) 0.55,-15.409 0.55,-4.11 cw(c2.54,-4.11) 0.853,-3.055 cw(c1.107,-3.215) 1.008,-2.931 ccw(c0,0) 1.713,-2.584 ccw(c0,0) 1.911,2.441 1.025,3.135 cw(c1.211,3.371) 1,3.158 0.878,3.28 ccw(c0.487,2.892) 0.865,3.292
NetK02_D2_1: K02_D2.1 K02_R1.2
NetK03_D1_2: K03_D1.2 K03_D2.2 K03_S1.2 | length 83.6
  Top Layer w0.3: -14.25,55.2 -12.993,53.943 cw(c-13.206,53.732) -12.924,53.629 ccw(c-11.75,53.2) -11.495,51.976 cw(c-11.435,51.682) -11.222,51.895 -10.991,51.663 ; -10.99,51.662 ccw(c-9.25,51.2) -9.701,49.457 -9.135,48.891 cw(c-9.349,48.681) -9.055,48.74 ccw(c-6.75,49.2) -8.479,47.608 cw(c-8.7,47.406) -8.4,47.407 ; 0.647,-32.763 cw(c2.54,-32.92) 2.057,-31.082 ccw(c1.979,-30.793) 2.245,-30.653 ccw(c0,-31.842) 1.796,-30.046 0.744,-28.994 cw(c2.54,-27.198) 0,-27.198 0,-21.833 cw(c0.3,-21.834) 0.268,-21.536 ccw(c0,-19) 0.267,-16.464 cw(c0.3,-16.166) 0,-16.167 0,-4.11 cw(c2.54,-4.11) 0.527,-2.562 cw(c0.764,-2.746) 0.682,-2.457 ccw(c0,0) 1.377,-2.146 ccw(c0,0) 1.573,2.007 0.66,2.722 cw(c0.845,2.958) 0.633,2.746 0.487,2.892 cw(c2.54,5.08) 0.958,7.629 1.708,8.095 ccw(c1.55,8.35) 1.85,8.346 1.85,8.348 1.85,11.657 ; 0.702,-32.439 ccw(c2.54,-32.92) 0.645,-33.054 0.647,-33.091 0.702,-33.939 ccw(c1.001,-33.919) 0.711,-33.993 ccw(c2.636,-33.493) 1.044,-34.686 ; 0.761,-34.157 ccw(c2.636,-33.493) 1.231,-34.901 1.805,-35.476 ccw(c2.016,-35.262) 1.837,-35.503 cw(c0,-38) 3.059,-37.5 cw(c0,-38) 2.979,-38.856 ccw(c3.268,-38.938) 2.968,-38.937 2.968,-50.025 cw(c2.418,-50.024) 2.69,-50.502 ccw(c2.84,-50.762) 2.54,-50.761 K03_S1.2@2.54,-51.92
NetK03_D2_1: K03_D2.1 K03_R1.2
NetK10_D1_2: K10_D1.2 K10_D2.2 K10_S1.2 | length 8.7
  Top Layer w0.3: K10_S1.2@21.54,5.08 21.756,5.296 ccw(c19.96,7.092) 22.5,7.092 22.5,13.45
NetK10_D2_1: K10_D2.1 K10_R1.2
NetK11_D1_2: K11_D1.2 K11_D2.2 K11_S1.2 | length 34.7
  Top Layer w0.3: 9.75,51.2 11.006,49.944 11.007,49.943 cw(c10.793,49.733) 11.079,49.644 11.056,49.571 ccw(c12.25,49.2) 11.565,48.154 cw(c11.4,47.904) 11.7,47.904 ; 20.008,3.956 ccw(c21.54,5.08) 20.416,3.548 ; 20.981,3.085 21.249,2.875 cw(c19,0) 20.558,-3.301 20.294,-3.565 ccw(c22.09,-5.361) 20.205,-3.658 ccw(c20.428,-3.859) 20.136,-3.791 ccw(c21.54,-4.11) 20.1,-4.11 20.1,-11.428 ccw(c22.64,-11.428) 20.844,-13.224 K11_S1.2@21.54,-13.92 ; 20.981,3.085 20.663,3.345 20.416,3.548 ; 21.1,6.928 cw(c21.54,5.08) 21.323,6.968 ; 21.95,12.154 21.95,7.795 cw(c21.1,7.795) 21.793,7.302 cw(c21.1,7.795) 21.767,7.268 cw(c21.1,7.795) 21.627,7.128 21.591,7.099 cw(c21.1,7.719) 21.4,6.987 cw(c21.287,7.265) 21.323,6.968 ; 20.416,3.548 cw(c21.54,5.08) 21.323,6.968
NetK11_D2_1: K11_D2.1 K11_R1.2
NetK12_D1_2: K12_D1.2 K12_D2.2 K12_S1.2 | length 58.7
  Top Layer w0.3: 7.25,53.2 8.507,51.943 ; 8.507,51.943 cw(c8.294,51.732) 8.576,51.629 ccw(c9.75,51.2) 10.005,49.976 10.372,49.609 cw(c10.159,49.398) 10.458,49.37 ccw(c12.25,49.2) 10.564,48.57 ccw(c12.25,49.2) 11.05,47.858 cw(c10.85,47.635) 11.15,47.635 ; 19.825,3.33 ccw(c21.54,5.08) 19.865,3.292 ; 21.4,11.885 21.4,7.795 cw(c21.1,7.795) 21.149,7.499 ccw(c21.54,5.08) 19.865,3.292 ; K12_S1.2@21.54,-32.92 K12_S1.2@21.54,-31.842 ; K12_S1.2@21.54,-31.841 cw(c21.84,-31.842) 21.556,-31.747 21.785,-31.063 ccw(c20.979,-30.793) 21.73,-30.395 ccw(c19,-31.842) 21.184,-29.656 20.134,-28.606 cw(c21.54,-27.198) 19.55,-27.198 19.55,-22.217 20.453,-21.739 ccw(c19,-19) 21.729,-17.529 ccw(c19,-19) 20.183,-16.135 cw(c20.299,-15.858) 20.089,-16.072 19.637,-15.62 cw(c19.85,-15.409) 19.55,-15.409 19.55,-4.11 cw(c21.54,-4.11) 19.853,-3.055 cw(c20.107,-3.215) 20.008,-2.931 ccw(c19,0) 20.713,-2.584 ccw(c19,0) 20.911,2.441 20.025,3.135 cw(c20.211,3.371) 20,3.158 19.878,3.28 ccw(c19.487,2.892) 19.865,3.292
NetK12_D2_1: K12_D2.1 K12_R1.2
NetK13_D1_2: K13_D1.2 K13_D2.2 K13_S1.2 | length 83.6
  Top Layer w0.3: 4.75,55.2 6.007,53.943 cw(c5.794,53.732) 6.076,53.629 ccw(c7.25,53.2) 7.505,51.976 cw(c7.565,51.682) 7.778,51.895 8.009,51.663 ; 8.01,51.662 ccw(c9.75,51.2) 9.299,49.457 9.865,48.891 cw(c9.651,48.681) 9.945,48.74 ccw(c12.25,49.2) 10.521,47.608 cw(c10.3,47.406) 10.6,47.407 ; 19.647,-32.763 cw(c21.54,-32.92) 21.057,-31.082 ccw(c20.979,-30.793) 21.245,-30.653 ccw(c19,-31.842) 20.796,-30.046 19.744,-28.994 cw(c21.54,-27.198) 19,-27.198 19,-21.833 cw(c19.3,-21.834) 19.268,-21.536 ccw(c19,-19) 19.267,-16.464 cw(c19.3,-16.166) 19,-16.167 19,-4.11 cw(c21.54,-4.11) 19.527,-2.562 cw(c19.764,-2.746) 19.682,-2.457 ccw(c19,0) 20.377,-2.146 ccw(c19,0) 20.573,2.007 19.66,2.722 cw(c19.845,2.958) 19.633,2.746 19.487,2.892 cw(c21.54,5.08) 19.958,7.629 20.708,8.095 ccw(c20.55,8.35) 20.85,8.346 20.85,8.348 20.85,11.657 ; 19.702,-32.439 ccw(c21.54,-32.92) 19.645,-33.054 19.647,-33.091 19.702,-33.939 ccw(c20.001,-33.919) 19.711,-33.993 ccw(c21.636,-33.493) 20.044,-34.686 ; 19.761,-34.157 ccw(c21.636,-33.493) 20.231,-34.901 20.805,-35.476 ccw(c21.016,-35.262) 20.837,-35.503 cw(c19,-38) 22.059,-37.5 cw(c19,-38) 21.979,-38.856 ccw(c22.268,-38.938) 21.968,-38.937 21.968,-50.025 cw(c21.418,-50.024) 21.69,-50.502 ccw(c21.84,-50.762) 21.54,-50.761 K13_S1.2@21.54,-51.92
NetK13_D2_1: K13_D2.1 K13_R1.2
NetK14_D1_2: K14_D1.2 K14_D2.2 K14_S1.2 | length 108.9
  Top Layer w0.3: 2.25,57.2 3.507,55.943 ; 3.507,55.943 cw(c3.294,55.732) 3.576,55.629 ccw(c4.75,55.2) 4.549,53.966 5.334,53.838 5.405,53.758 cw(c5.181,53.559) 5.476,53.505 ccw(c7.25,53.2) 7.25,51.4 ccw(c9.53,51.4) 7.642,50.121 7.804,49.882 ccw(c9.75,51.2) 8.463,49.234 cw(c8.298,48.983) 8.51,49.195 9.498,48.208 cw(c9.285,47.996) 9.563,48.11 ccw(c12.25,49.2) 10.05,47.311 ; K14_S1.2@16.79,-72.92 16.79,-61.752 cw(c19.33,-61.752) 17.534,-59.956 17.973,-59.517 cw(c18.184,-59.731) 18.269,-59.443 ccw(c19,-57) 21.418,-56.19 21.418,-54.079 ccw(c21.118,-54.079) 21.175,-53.785 cw(c21.54,-51.92) 21.177,-50.055 ccw(c21.118,-49.761) 21.418,-49.761 21.418,-38.856 ; 20.3,11.561 20.3,8.656 cw(c20,8.656) 20.159,8.401 19.668,8.096 ccw(c21.54,5.08) 17.99,5.08 ccw(c22.155,5.08) 18.165,3.886 18.165,3.885 cw(c17.877,3.8) 18.177,3.798 cw(c15.577,3.844) 17.379,1.969 ccw(c19,0) 18.027,-2.357 18.372,-2.5 cw(c18.258,-2.777) 18.424,-2.527 18.464,-2.554 cw(c17.625,-3.247) 18.633,-2.838 cw(c18.355,-2.95) 18.637,-3.051 ccw(c21.54,-4.11) 18.45,-4.11 18.45,-16.28 cw(c18.15,-16.28) 18.24,-16.566 ccw(c19,-19) 17.636,-21.155 18.31,-21.582 cw(c18.15,-21.835) 18.45,-21.835 18.45,-27.198 ccw(c21.54,-27.198) 19.356,-29.384 20.329,-30.357 ; 20.329,-30.357 cw(c20.116,-30.568) 20.272,-30.824 ccw(c21.54,-32.92) 19.096,-33.088 cw(c18.797,-33.109) 19.096,-33.109 19.096,-33.493 ccw(c21.636,-33.493) 19.84,-35.289 20.447,-35.895 ccw(c20.658,-35.682) 20.482,-35.925 cw(c19,-38) 21.431,-37.231 cw(c19,-38) 21.432,-38.768
NetK14_D2_1: K14_D2.1 K14_R1.2
NetK20_D1_2: K20_D1.2 K20_D2.2 K20_S1.2 | length 8.7
  Top Layer w0.3: K20_S1.2@40.54,5.08 40.756,5.296 ccw(c38.96,7.092) 41.5,7.092 41.5,13.45
NetK20_D2_1: K20_D2.1 K20_R1.2
NetK21_D1_2: K21_D1.2 K21_D2.2 K21_S1.2 | length 34.7
  Top Layer w0.3: 28.75,51.2 30.006,49.944 ; 30.7,47.904 ccw(c30.4,47.904) 30.565,48.154 cw(c31.25,49.2) 30.056,49.571 30.079,49.644 ccw(c29.793,49.733) 30.007,49.943 ; 39.008,3.956 ccw(c40.54,5.08) 39.416,3.548 ; 39.981,3.085 40.249,2.875 ; 39.981,3.085 39.663,3.345 39.416,3.548 ; 40.1,6.928 cw(c40.54,5.08) 40.323,6.968 ; 40.249,2.875 cw(c38,0) 39.558,-3.301 39.294,-3.565 ccw(c41.09,-5.361) 39.205,-3.658 ccw(c39.428,-3.859) 39.136,-3.791 ccw(c40.54,-4.11) 39.1,-4.11 39.1,-11.428 ccw(c41.64,-11.428) 39.844,-13.224 K21_S1.2@40.54,-13.92 ; 40.95,12.154 40.95,7.795 cw(c40.1,7.795) 40.793,7.302 cw(c40.1,7.795) 40.767,7.268 cw(c40.1,7.795) 40.627,7.128 40.591,7.099 cw(c40.1,7.719) 40.4,6.987 cw(c40.287,7.265) 40.323,6.968 ; 30.006,49.944 30.007,49.943 ; 39.416,3.548 cw(c40.54,5.08) 40.323,6.968
NetK21_D2_1: K21_D2.1 K21_R1.2
NetK22_D1_2: K22_D1.2 K22_D2.2 K22_S1.2 | length 58.7
  Top Layer w0.3: 26.25,53.2 27.507,51.943 cw(c27.294,51.732) 27.576,51.629 ccw(c28.75,51.2) 29.005,49.976 29.372,49.609 cw(c29.159,49.398) 29.458,49.37 ccw(c31.25,49.2) 29.564,48.57 ccw(c31.25,49.2) 30.05,47.858 cw(c29.85,47.635) 30.15,47.635 ; 38.825,3.33 ccw(c40.54,5.08) 38.865,3.292 ; 40.4,11.885 40.4,7.795 cw(c40.1,7.795) 40.149,7.499 ccw(c40.54,5.08) 38.865,3.292 ; K22_S1.2@40.54,-32.92 K22_S1.2@40.54,-31.842 ; K22_S1.2@40.54,-31.841 cw(c40.84,-31.842) 40.556,-31.747 40.785,-31.063 ccw(c39.979,-30.793) 40.73,-30.395 ccw(c38,-31.842) 40.184,-29.656 39.134,-28.606 cw(c40.54,-27.198) 38.55,-27.198 38.55,-22.217 39.453,-21.739 ccw(c38,-19) 40.729,-17.529 ccw(c38,-19) 39.183,-16.135 cw(c39.299,-15.858) 39.089,-16.072 38.637,-15.62 cw(c38.85,-15.409) 38.55,-15.409 38.55,-4.11 cw(c40.54,-4.11) 38.853,-3.055 cw(c39.107,-3.215) 39.008,-2.931 ccw(c38,0) 39.713,-2.584 ccw(c38,0) 39.911,2.441 39.025,3.135 cw(c39.211,3.371) 39,3.158 38.878,3.28 ccw(c38.487,2.892) 38.865,3.292
NetK22_D2_1: K22_D2.1 K22_R1.2
NetK23_D1_2: K23_D1.2 K23_D2.2 K23_S1.2 | length 83.6
  Top Layer w0.3: 23.75,55.2 25.007,53.943 cw(c24.794,53.732) 25.076,53.629 ccw(c26.25,53.2) 26.505,51.976 cw(c26.565,51.682) 26.778,51.895 27.009,51.663 ; 27.01,51.662 ccw(c28.75,51.2) 28.299,49.457 28.865,48.891 cw(c28.651,48.681) 28.945,48.74 ccw(c31.25,49.2) 29.521,47.608 cw(c29.3,47.406) 29.6,47.407 ; 38.647,-32.763 cw(c40.54,-32.92) 40.057,-31.082 ccw(c39.979,-30.793) 40.245,-30.653 ccw(c38,-31.842) 39.796,-30.046 38.744,-28.994 cw(c40.54,-27.198) 38,-27.198 38,-21.833 cw(c38.3,-21.834) 38.268,-21.536 ccw(c38,-19) 38.267,-16.464 cw(c38.3,-16.166) 38,-16.167 38,-4.11 cw(c40.54,-4.11) 38.527,-2.562 cw(c38.764,-2.746) 38.682,-2.457 ccw(c38,0) 39.377,-2.146 ccw(c38,0) 39.573,2.007 38.66,2.722 cw(c38.845,2.958) 38.633,2.746 38.487,2.892 cw(c40.54,5.08) 38.958,7.629 39.708,8.095 ccw(c39.55,8.35) 39.85,8.346 39.85,8.348 39.85,11.657 ; 38.702,-32.439 ccw(c40.54,-32.92) 38.645,-33.054 38.647,-33.091 38.702,-33.939 ccw(c39.001,-33.919) 38.711,-33.993 ccw(c40.636,-33.493) 39.044,-34.686 ; 38.761,-34.157 ccw(c40.636,-33.493) 39.231,-34.901 39.805,-35.476 ccw(c40.016,-35.262) 39.837,-35.503 cw(c38,-38) 41.059,-37.5 cw(c38,-38) 40.979,-38.856 ccw(c41.268,-38.938) 40.968,-38.937 40.968,-50.025 cw(c40.418,-50.024) 40.69,-50.502 ccw(c40.84,-50.762) 40.54,-50.761 K23_S1.2@40.54,-51.92
NetK23_D2_1: K23_D2.1 K23_R1.2
NetK24_D1_2: K24_D1.2 K24_D2.2 K24_S1.2 | length 108.9
  Top Layer w0.3: 21.25,57.2 22.507,55.943 cw(c22.294,55.732) 22.576,55.629 ccw(c23.75,55.2) 23.549,53.966 24.334,53.838 24.405,53.758 cw(c24.181,53.559) 24.476,53.505 ccw(c26.25,53.2) 26.25,51.4 ccw(c28.53,51.4) 26.642,50.121 26.804,49.882 ccw(c28.75,51.2) 27.463,49.234 cw(c27.298,48.983) 27.51,49.195 28.498,48.208 cw(c28.285,47.996) 28.563,48.11 ccw(c31.25,49.2) 29.05,47.311 ; 35.79,-72.92 35.79,-61.752 cw(c38.33,-61.752) 36.534,-59.956 36.973,-59.517 cw(c37.184,-59.731) 37.269,-59.443 ccw(c38,-57) 40.418,-56.19 40.418,-54.079 ccw(c40.118,-54.079) 40.175,-53.785 cw(c40.54,-51.92) 40.177,-50.055 ccw(c40.118,-49.761) 40.418,-49.761 40.418,-38.856 ; 39.3,11.561 39.3,8.656 cw(c39,8.656) 39.159,8.401 38.668,8.096 ccw(c40.54,5.08) 36.99,5.08 ccw(c41.155,5.08) 37.165,3.886 37.165,3.885 cw(c36.877,3.8) 37.177,3.798 cw(c34.577,3.844) 36.379,1.969 ccw(c38,0) 37.027,-2.357 37.372,-2.5 cw(c37.258,-2.777) 37.424,-2.527 37.464,-2.554 cw(c36.625,-3.247) 37.633,-2.838 cw(c37.355,-2.95) 37.637,-3.051 ccw(c40.54,-4.11) 37.45,-4.11 37.45,-16.28 cw(c37.15,-16.28) 37.24,-16.566 ccw(c38,-19) 36.636,-21.155 37.31,-21.582 cw(c37.15,-21.835) 37.45,-21.835 37.45,-27.198 ccw(c40.54,-27.198) 38.356,-29.384 39.329,-30.357 ; 39.329,-30.357 cw(c39.116,-30.568) 39.272,-30.824 ccw(c40.54,-32.92) 38.096,-33.088 cw(c37.797,-33.109) 38.096,-33.109 38.096,-33.493 ccw(c40.636,-33.493) 38.84,-35.289 39.447,-35.895 ccw(c39.658,-35.682) 39.482,-35.925 cw(c38,-38) 40.431,-37.231 cw(c38,-38) 40.432,-38.768
NetK24_D2_1: K24_D2.1 K24_R1.2
NetK30_D1_2: K30_D1.2 K30_D2.2 K30_S1.2 | length 8.7
  Top Layer w0.3: K30_S1.2@59.54,5.08 59.756,5.296 ccw(c57.96,7.092) 60.5,7.092 60.5,13.45
NetK30_D2_1: K30_D2.1 K30_R1.2
NetK31_D1_2: K31_D1.2 K31_D2.2 K31_S1.2 | length 34.7
  Top Layer w0.3: 47.75,51.2 49.006,49.944 49.007,49.943 cw(c48.793,49.733) 49.079,49.644 49.056,49.571 ccw(c50.25,49.2) 49.565,48.154 cw(c49.4,47.904) 49.7,47.904 ; 58.008,3.956 ccw(c59.54,5.08) 58.416,3.548 ; 58.981,3.085 58.663,3.345 58.416,3.548 ; 58.981,3.085 59.249,2.875 cw(c57,0) 58.558,-3.301 58.294,-3.565 ccw(c60.09,-5.361) 58.205,-3.658 ccw(c58.428,-3.859) 58.136,-3.791 ccw(c59.54,-4.11) 58.1,-4.11 58.1,-11.428 ccw(c60.64,-11.428) 58.844,-13.224 K31_S1.2@59.54,-13.92 ; 59.1,6.928 cw(c59.54,5.08) 59.323,6.968 ; 59.95,12.154 59.95,7.795 cw(c59.1,7.795) 59.793,7.302 cw(c59.1,7.795) 59.767,7.268 cw(c59.1,7.795) 59.627,7.128 59.591,7.099 cw(c59.1,7.719) 59.4,6.987 cw(c59.287,7.265) 59.323,6.968 ; 58.416,3.548 cw(c59.54,5.08) 59.323,6.968
NetK31_D2_1: K31_D2.1 K31_R1.2
NetK32_D1_2: K32_D1.2 K32_D2.2 K32_S1.2 | length 58.7
  Top Layer w0.3: 45.25,53.2 46.507,51.943 cw(c46.294,51.732) 46.576,51.629 ccw(c47.75,51.2) 48.005,49.976 48.372,49.609 cw(c48.159,49.398) 48.458,49.37 ccw(c50.25,49.2) 48.564,48.57 ccw(c50.25,49.2) 49.05,47.858 cw(c48.85,47.635) 49.15,47.635 ; 57.825,3.33 ccw(c59.54,5.08) 57.865,3.292 ; 59.4,11.885 59.4,7.795 cw(c59.1,7.795) 59.149,7.499 ccw(c59.54,5.08) 57.865,3.292 ; K32_S1.2@59.54,-32.92 K32_S1.2@59.54,-31.842 ; K32_S1.2@59.54,-31.841 cw(c59.84,-31.842) 59.556,-31.747 59.785,-31.063 ccw(c58.979,-30.793) 59.73,-30.395 ccw(c57,-31.842) 59.184,-29.656 58.134,-28.606 cw(c59.54,-27.198) 57.55,-27.198 57.55,-22.217 58.453,-21.739 ccw(c57,-19) 59.729,-17.529 ccw(c57,-19) 58.183,-16.135 cw(c58.299,-15.858) 58.089,-16.072 57.637,-15.62 cw(c57.85,-15.409) 57.55,-15.409 57.55,-4.11 cw(c59.54,-4.11) 57.853,-3.055 cw(c58.107,-3.215) 58.008,-2.931 ccw(c57,0) 58.713,-2.584 ccw(c57,0) 58.911,2.441 58.025,3.135 cw(c58.211,3.371) 58,3.158 57.878,3.28 ccw(c57.487,2.892) 57.865,3.292
NetK32_D2_1: K32_D2.1 K32_R1.2
NetK33_D1_2: K33_D1.2 K33_D2.2 K33_S1.2 | length 83.6
  Top Layer w0.3: 42.75,55.2 44.007,53.943 cw(c43.794,53.732) 44.076,53.629 ccw(c45.25,53.2) 45.505,51.976 cw(c45.565,51.682) 45.778,51.895 46.009,51.663 ; 46.01,51.662 ccw(c47.75,51.2) 47.299,49.457 47.865,48.891 cw(c47.651,48.681) 47.945,48.74 ccw(c50.25,49.2) 48.521,47.608 cw(c48.3,47.406) 48.6,47.407 ; 57.647,-32.763 cw(c59.54,-32.92) 59.057,-31.082 ccw(c58.979,-30.793) 59.245,-30.653 ccw(c57,-31.842) 58.796,-30.046 57.744,-28.994 cw(c59.54,-27.198) 57,-27.198 57,-21.833 cw(c57.3,-21.834) 57.268,-21.536 ccw(c57,-19) 57.267,-16.464 cw(c57.3,-16.166) 57,-16.167 57,-4.11 cw(c59.54,-4.11) 57.527,-2.562 cw(c57.764,-2.746) 57.682,-2.457 ccw(c57,0) 58.377,-2.146 ccw(c57,0) 58.573,2.007 57.66,2.722 cw(c57.845,2.958) 57.633,2.746 57.487,2.892 cw(c59.54,5.08) 57.958,7.629 58.708,8.095 ccw(c58.55,8.35) 58.85,8.346 58.85,8.348 58.85,11.657 ; 57.702,-32.439 ccw(c59.54,-32.92) 57.645,-33.054 57.647,-33.091 57.702,-33.939 ccw(c58.001,-33.919) 57.711,-33.993 ccw(c59.636,-33.493) 58.044,-34.686 ; 57.761,-34.157 ccw(c59.636,-33.493) 58.231,-34.901 58.805,-35.476 ccw(c59.016,-35.262) 58.837,-35.503 cw(c57,-38) 60.059,-37.5 cw(c57,-38) 59.979,-38.856 ccw(c60.268,-38.938) 59.968,-38.937 59.968,-50.025 cw(c59.418,-50.024) 59.69,-50.502 ccw(c59.84,-50.762) 59.54,-50.761 K33_S1.2@59.54,-51.92
NetK33_D2_1: K33_D2.1 K33_R1.2
NetK40_D1_2: K40_D1.2 K40_D2.2 K40_S1.2 | length 8.7
  Top Layer w0.3: K40_S1.2@78.79,5.08 79.006,5.296 ccw(c77.21,7.092) 79.75,7.092 79.75,13.45
NetK40_D2_1: K40_D2.1 K40_R1.2
NetK41_D1_2: K41_D1.2 K41_D2.2 K41_S1.2 | length 34.7
  Top Layer w0.3: 67,51.2 68.256,49.944 68.257,49.943 cw(c68.043,49.733) 68.329,49.644 68.306,49.571 ccw(c69.5,49.2) 68.815,48.154 cw(c68.65,47.904) 68.95,47.904 ; 77.258,3.956 ccw(c78.79,5.08) 77.666,3.548 ; 78.231,3.085 78.499,2.875 cw(c76.25,0) 77.808,-3.301 77.544,-3.565 ccw(c79.34,-5.361) 77.455,-3.658 ccw(c77.678,-3.859) 77.386,-3.791 ccw(c78.79,-4.11) 77.35,-4.11 77.35,-11.428 ccw(c79.89,-11.428) 78.094,-13.224 K41_S1.2@78.79,-13.92 ; 78.231,3.085 77.913,3.345 77.666,3.548 ; 78.35,6.928 cw(c78.79,5.08) 78.573,6.968 ; 79.2,12.154 79.2,7.795 cw(c78.35,7.795) 79.043,7.302 cw(c78.35,7.795) 79.017,7.268 cw(c78.35,7.795) 78.877,7.128 78.841,7.099 cw(c78.35,7.719) 78.65,6.987 cw(c78.537,7.265) 78.573,6.968 ; 77.666,3.548 cw(c78.79,5.08) 78.573,6.968
NetK41_D2_1: K41_D2.1 K41_R1.2
NetK42_D1_2: K42_D1.2 K42_D2.2 K42_S1.2 | length 58.7
  Top Layer w0.3: 64.5,53.2 65.757,51.943 cw(c65.544,51.732) 65.826,51.629 ccw(c67,51.2) 67.255,49.976 67.622,49.609 cw(c67.409,49.398) 67.708,49.37 ccw(c69.5,49.2) 67.814,48.57 ccw(c69.5,49.2) 68.3,47.858 cw(c68.1,47.635) 68.4,47.635 ; 77.075,3.33 ccw(c78.79,5.08) 77.115,3.292 ; 78.65,11.885 78.65,7.795 cw(c78.35,7.795) 78.399,7.499 ccw(c78.79,5.08) 77.115,3.292 ; K42_S1.2@78.79,-32.92 K42_S1.2@78.79,-31.842 ; K42_S1.2@78.79,-31.841 cw(c79.09,-31.842) 78.806,-31.747 79.035,-31.063 ccw(c78.229,-30.793) 78.98,-30.395 ccw(c76.25,-31.842) 78.434,-29.656 77.384,-28.606 cw(c78.79,-27.198) 76.8,-27.198 76.8,-22.217 77.703,-21.739 ccw(c76.25,-19) 78.979,-17.529 ccw(c76.25,-19) 77.433,-16.135 cw(c77.549,-15.858) 77.339,-16.072 76.887,-15.62 cw(c77.1,-15.409) 76.8,-15.409 76.8,-4.11 cw(c78.79,-4.11) 77.103,-3.055 cw(c77.357,-3.215) 77.258,-2.931 ccw(c76.25,0) 77.963,-2.584 ccw(c76.25,0) 78.161,2.441 77.275,3.135 cw(c77.461,3.371) 77.25,3.158 77.128,3.28 ccw(c76.737,2.892) 77.115,3.292
NetK42_D2_1: K42_D2.1 K42_R1.2
NetK43_D1_2: K43_D1.2 K43_D2.2 K43_S1.2 | length 83.6
  Top Layer w0.3: 62,55.2 63.257,53.943 cw(c63.044,53.732) 63.326,53.629 ccw(c64.5,53.2) 64.755,51.976 cw(c64.815,51.682) 65.028,51.895 65.259,51.663 ; 65.26,51.662 ccw(c67,51.2) 66.549,49.457 67.115,48.891 cw(c66.901,48.681) 67.195,48.74 ccw(c69.5,49.2) 67.771,47.608 cw(c67.55,47.406) 67.85,47.407 ; 76.897,-32.763 cw(c78.79,-32.92) 78.307,-31.082 ccw(c78.229,-30.793) 78.495,-30.653 ccw(c76.25,-31.842) 78.046,-30.046 76.994,-28.994 cw(c78.79,-27.198) 76.25,-27.198 76.25,-21.833 cw(c76.55,-21.834) 76.518,-21.536 ccw(c76.25,-19) 76.517,-16.464 cw(c76.55,-16.166) 76.25,-16.167 76.25,-4.11 cw(c78.79,-4.11) 76.777,-2.562 cw(c77.014,-2.746) 76.932,-2.457 ccw(c76.25,0) 77.627,-2.146 ccw(c76.25,0) 77.823,2.007 76.91,2.722 cw(c77.095,2.958) 76.883,2.746 76.737,2.892 cw(c78.79,5.08) 77.208,7.629 77.958,8.095 ccw(c77.8,8.35) 78.1,8.346 78.1,8.348 78.1,11.657 ; 76.952,-32.439 ccw(c78.79,-32.92) 76.895,-33.054 76.897,-33.091 76.952,-33.939 ccw(c77.251,-33.919) 76.961,-33.993 ccw(c78.886,-33.493) 77.294,-34.686 ; 77.011,-34.157 ccw(c78.886,-33.493) 77.481,-34.901 78.055,-35.476 ccw(c78.266,-35.262) 78.087,-35.503 cw(c76.25,-38) 79.309,-37.5 cw(c76.25,-38) 79.229,-38.856 ccw(c79.518,-38.938) 79.218,-38.937 79.218,-50.025 cw(c78.668,-50.024) 78.94,-50.502 ccw(c79.09,-50.762) 78.79,-50.761 K43_S1.2@78.79,-51.92
NetK43_D2_1: K43_D2.1 K43_R1.2
NetK44_D1_2: K44_D1.2 K44_D2.2 K44_S1.2 | length 108.9
  Top Layer w0.3: 59.5,57.2 60.757,55.943 cw(c60.544,55.732) 60.826,55.629 ccw(c62,55.2) 61.799,53.966 62.584,53.838 62.655,53.758 cw(c62.431,53.559) 62.726,53.505 ccw(c64.5,53.2) 64.5,51.4 ccw(c66.78,51.4) 64.892,50.121 65.054,49.882 ccw(c67,51.2) 65.713,49.234 cw(c65.548,48.983) 65.76,49.195 66.748,48.208 cw(c66.535,47.996) 66.813,48.11 ccw(c69.5,49.2) 67.3,47.311 ; 74.04,-72.92 74.04,-61.752 cw(c76.58,-61.752) 74.784,-59.956 75.223,-59.517 cw(c75.434,-59.731) 75.519,-59.443 ccw(c76.25,-57) 78.668,-56.19 78.668,-54.079 ccw(c78.368,-54.079) 78.425,-53.785 cw(c78.79,-51.92) 78.427,-50.055 ccw(c78.368,-49.761) 78.668,-49.761 78.668,-38.856 ; 77.55,11.561 77.55,8.656 cw(c77.25,8.656) 77.409,8.401 76.918,8.096 ccw(c78.79,5.08) 75.24,5.08 ccw(c79.405,5.08) 75.415,3.886 75.415,3.885 cw(c75.127,3.8) 75.427,3.798 cw(c72.827,3.844) 74.629,1.969 ccw(c76.25,0) 75.277,-2.357 75.622,-2.5 cw(c75.508,-2.777) 75.674,-2.527 75.714,-2.554 cw(c74.875,-3.247) 75.883,-2.838 cw(c75.605,-2.95) 75.887,-3.051 ccw(c78.79,-4.11) 75.7,-4.11 75.7,-16.28 cw(c75.4,-16.28) 75.49,-16.566 ccw(c76.25,-19) 74.886,-21.155 75.56,-21.582 cw(c75.4,-21.835) 75.7,-21.835 75.7,-27.198 ccw(c78.79,-27.198) 76.606,-29.384 77.579,-30.357 ; 77.579,-30.357 cw(c77.366,-30.568) 77.522,-30.824 ccw(c78.79,-32.92) 76.346,-33.088 cw(c76.047,-33.109) 76.346,-33.109 76.346,-33.493 ccw(c78.886,-33.493) 77.09,-35.289 77.697,-35.895 ccw(c77.908,-35.682) 77.732,-35.925 cw(c76.25,-38) 78.681,-37.231 cw(c76.25,-38) 78.682,-38.768
NetK44_D2_1: K44_D2.1 K44_R1.2
NetK50_D1_2: K50_D1.2 K50_D2.2 K50_S1.2 | length 8.7
  Top Layer w0.3: K50_S1.2@97.79,5.08 98.006,5.296 ccw(c96.21,7.092) 98.75,7.092 98.75,13.45
NetK50_D2_1: K50_D2.1 K50_R1.2
NetK51_D1_2: K51_D1.2 K51_D2.2 K51_S1.2 | length 34.7
  Top Layer w0.3: 86,51.2 87.256,49.944 87.257,49.943 cw(c87.043,49.733) 87.329,49.644 87.306,49.571 ccw(c88.5,49.2) 87.815,48.154 cw(c87.65,47.904) 87.95,47.904 ; 96.258,3.956 ccw(c97.79,5.08) 96.666,3.548 ; 97.231,3.085 96.913,3.345 96.666,3.548 ; 97.231,3.085 97.499,2.875 cw(c95.25,0) 96.808,-3.301 96.544,-3.565 ccw(c98.34,-5.361) 96.455,-3.658 ccw(c96.678,-3.859) 96.386,-3.791 ccw(c97.79,-4.11) 96.35,-4.11 96.35,-11.428 ccw(c98.89,-11.428) 97.094,-13.224 K51_S1.2@97.79,-13.92 ; 97.35,6.928 cw(c97.79,5.08) 97.573,6.968 ; 98.2,12.154 98.2,7.795 cw(c97.35,7.795) 98.043,7.302 cw(c97.35,7.795) 98.017,7.268 cw(c97.35,7.795) 97.877,7.128 97.841,7.099 cw(c97.35,7.719) 97.65,6.987 cw(c97.537,7.265) 97.573,6.968 ; 96.666,3.548 cw(c97.79,5.08) 97.573,6.968
NetK51_D2_1: K51_D2.1 K51_R1.2
NetK52_D1_2: K52_D1.2 K52_D2.2 K52_S1.2 | length 58.7
  Top Layer w0.3: 83.5,53.2 84.757,51.943 cw(c84.544,51.732) 84.826,51.629 ccw(c86,51.2) 86.255,49.976 86.622,49.609 cw(c86.409,49.398) 86.708,49.37 ccw(c88.5,49.2) 86.814,48.57 ccw(c88.5,49.2) 87.3,47.858 cw(c87.1,47.635) 87.4,47.635 ; 96.075,3.33 ccw(c97.79,5.08) 96.115,3.292 ; 97.65,11.885 97.65,7.795 cw(c97.35,7.795) 97.399,7.499 ccw(c97.79,5.08) 96.115,3.292 ; K52_S1.2@97.79,-32.92 K52_S1.2@97.79,-31.842 ; K52_S1.2@97.79,-31.841 cw(c98.09,-31.842) 97.806,-31.747 98.035,-31.063 ccw(c97.229,-30.793) 97.98,-30.395 ccw(c95.25,-31.842) 97.434,-29.656 96.384,-28.606 cw(c97.79,-27.198) 95.8,-27.198 95.8,-22.217 96.703,-21.739 ccw(c95.25,-19) 97.979,-17.529 ccw(c95.25,-19) 96.433,-16.135 cw(c96.549,-15.858) 96.339,-16.072 95.887,-15.62 cw(c96.1,-15.409) 95.8,-15.409 95.8,-4.11 cw(c97.79,-4.11) 96.103,-3.055 cw(c96.357,-3.215) 96.258,-2.931 ccw(c95.25,0) 96.963,-2.584 ccw(c95.25,0) 97.161,2.441 96.275,3.135 cw(c96.461,3.371) 96.25,3.158 96.128,3.28 ccw(c95.737,2.892) 96.115,3.292
NetK52_D2_1: K52_D2.1 K52_R1.2